# EAGLE board astable_sch (1) (EAGLE 8.7.0)
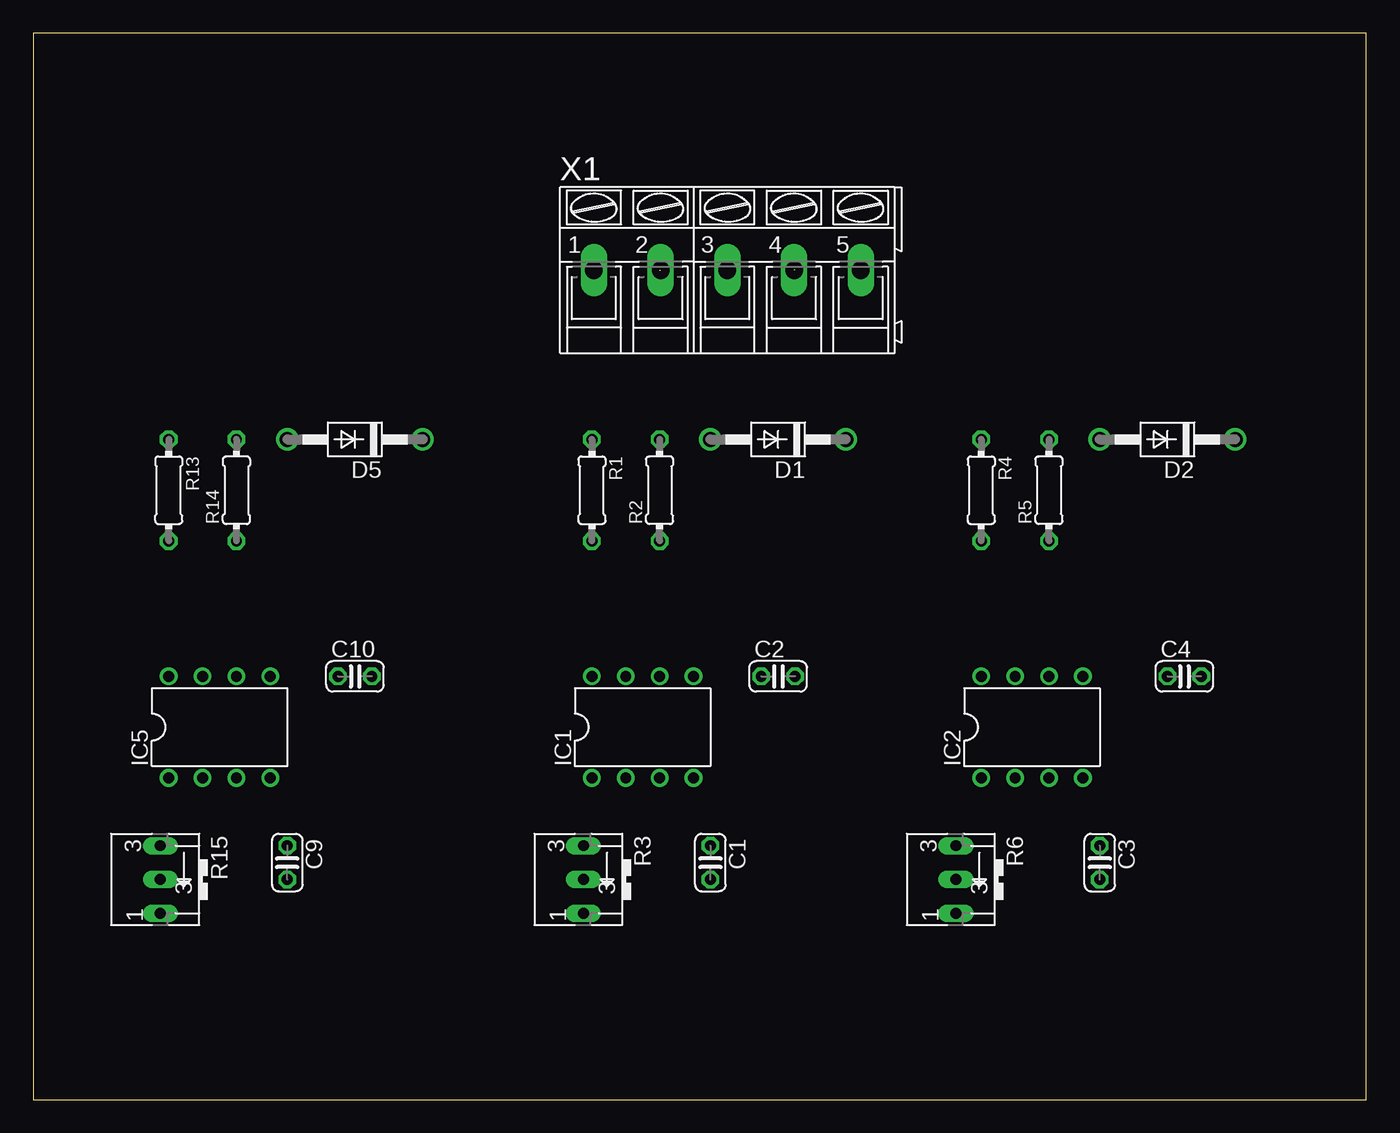
[diagram p0: board, top side]
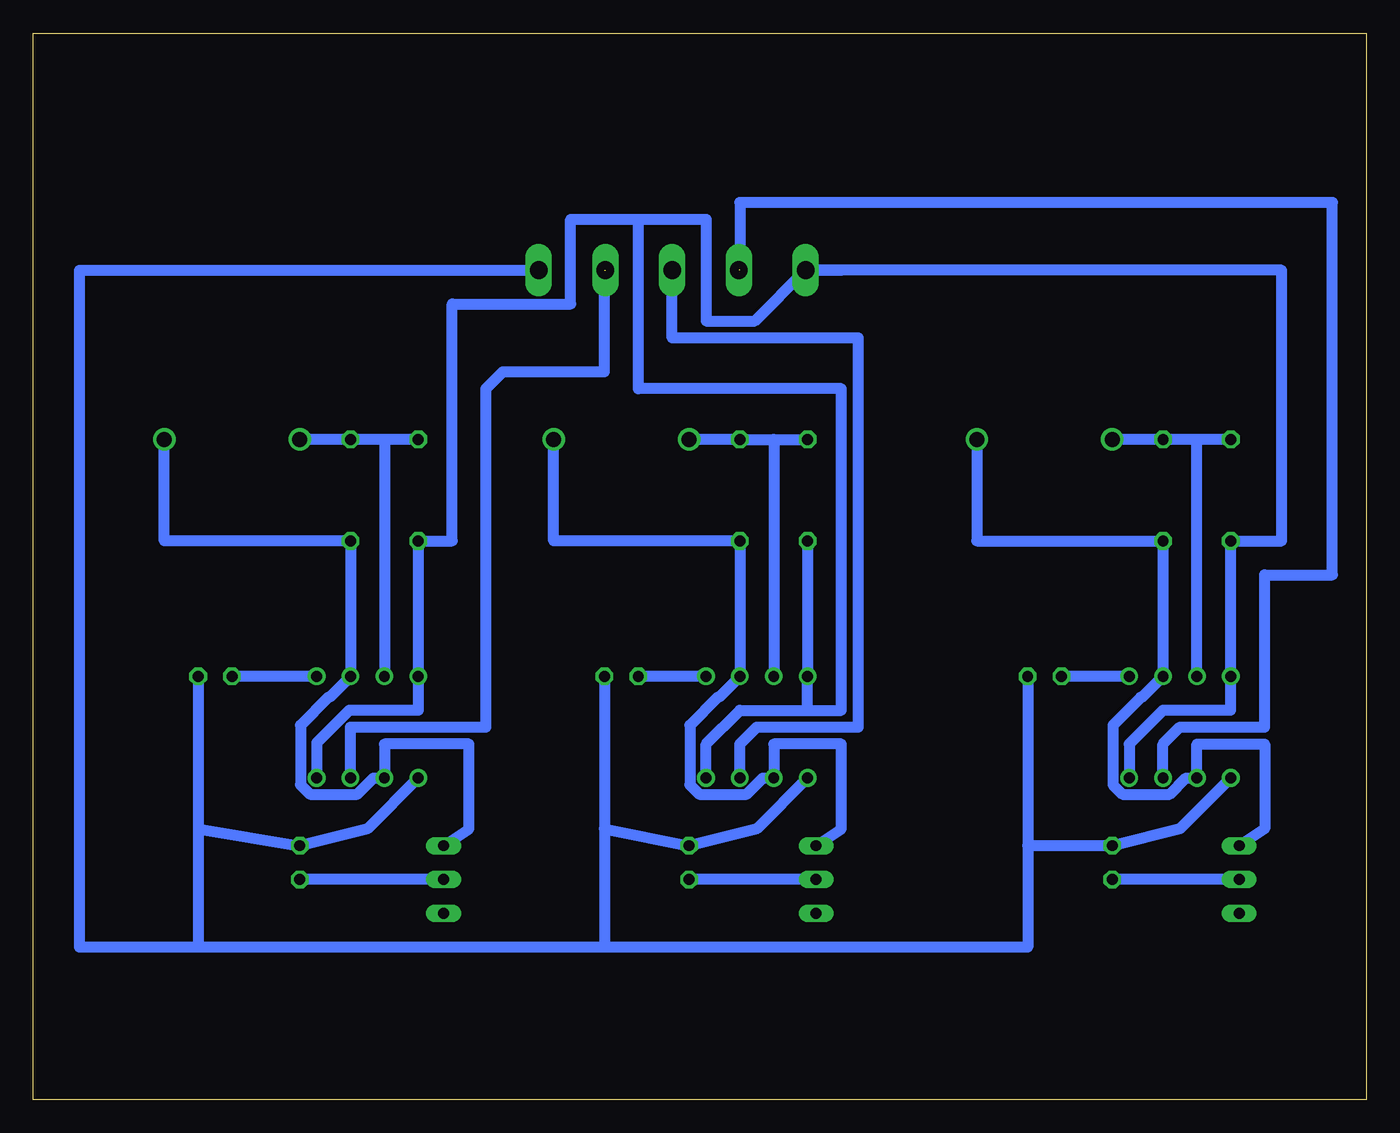
[diagram p1: board, bottom side, seen from below]

Size 100 x 80 mm. Coordinates in mm from the lower left corner, seen from the top.
Outline: 0,0 100,0 100,80 0,80 0,0
Copper layers (1*16): Top 0.035mm / dielectric 1.5mm / Bottom 0.035mm
Design rules "default": minimum track width 6mil, minimum drill 0.35mm, track to track 6mil, track to pad 6mil, pad to pad 6mil, via to via 6mil, smd to smd 6mil, copper to edge 40mil, drill to drill 6mil, minimum pad ring 10mil, minimum via ring 8mil, stop-mask expansion 4mil, vias tented up to drill 0mil, thermal gap 10mil

## Footprints (pad centres in the part's own frame; a part is rotated, then mirrored left to right if it is on the bottom)
C025-024X044 = drill 0.813 octagon: 1 -1.27,0; 2 1.27,0
DO41-10 = drill 1.118: A 5.08,0; C -5.08,0
DIL08 = drill 0.813 pad 1.27: 1 -3.81,-3.81; 2 -1.27,-3.81; 3 1.27,-3.81; 4 3.81,-3.81; 5 3.81,3.81; 6 1.27,3.81; 7 -1.27,3.81; 8 -3.81,3.81
0204/7 = drill 0.813 octagon: 1 -3.81,0; 2 3.81,0
B25V = drill 0.813 long: A 2.54,0.635; E -2.54,0.635; S 0,0.635
AK300/5 = drill 1.321 long: 1 -10.008,0; 2 -5.004,0; 3 0,0; 4 5.004,0; 5 10.008,0

## Placement (x,y rotation side)
C1  [C025-024X044]  50.8,17.78 270 top
C2  [C025-024X044]  55.88,31.75 0 top
C3  [C025-024X044]  80.01,17.78 270 top
C4  [C025-024X044]  86.36,31.75 0 top
C9  [C025-024X044]  19.05,17.78 270 top
C10  [C025-024X044]  24.13,31.75 0 top
D1  1N4004  [DO41-10]  55.88,49.53 180 top
D2  1N4004  [DO41-10]  85.09,49.53 180 top
D5  1N4004  [DO41-10]  24.13,49.53 180 top
IC1  LM555N  [DIL08]  45.72,27.94 0 top
IC2  LM555N  [DIL08]  74.93,27.94 0 top
IC5  LM555N  [DIL08]  13.97,27.94 0 top
R1  [0204/7]  41.91,45.72 270 top
R2  [0204/7]  46.99,45.72 90 top
R3  [B25V]  40.64,16.51 270 top
R4  [0204/7]  71.12,45.72 270 top
R5  [0204/7]  76.2,45.72 90 top
R6  [B25V]  68.58,16.51 270 top
R13  [0204/7]  10.16,45.72 270 top
R14  [0204/7]  15.24,45.72 90 top
R15  [B25V]  8.89,16.51 270 top
X1  [AK300/5]  52.07,62.23 0 top

## Library data of the parts
C1-C4 C9 C10 = rcl; SPICEPREFIX: C
D1 D2 D5 = diode
IC1 IC2 IC5 = linear
R1 R2 R4 R5 R13 R14 = rcl; SPICEPREFIX: R
R3 R6 R15 = pot
X1 = con-ptr500; OC_FARNELL: unknown; OC_NEWARK: unknown

## Nets
GND: C1.1 C2.2 C3.1 C4.2 C9.1 C10.2 IC1.1 IC2.1 IC5.1 X1.5
N$1: D1.A IC1.7 R1.1 R2.2
N$2: D1.C IC1.2 IC1.6 R2.1 R3.E
N$3: C2.1 IC1.5
N$4: IC1.3 X1.3
N$5: C1.2 R3.S
N$6: D2.A IC2.7 R4.1 R5.2
N$7: D2.C IC2.2 IC2.6 R5.1 R6.E
N$8: C4.1 IC2.5
N$9: IC2.3 X1.4
N$10: C3.2 R6.S
N$21: D5.A IC5.7 R13.1 R14.2
N$22: D5.C IC5.2 IC5.6 R14.1 R15.E
N$23: C10.1 IC5.5
N$24: IC5.3 X1.2
N$25: C9.2 R15.S
VCC: IC1.4 IC1.8 IC2.4 IC2.8 IC5.4 IC5.8 R1.2 R4.2 R13.2 X1.1

## Tracks (layer width: path | path; a pad name or v marks a point on that pad's centre or on a via)
GND
  Bottom 0.813: IC1.1 45.72,20.32 C1.1 57.15,20.32 | C2.2 57.15,20.32 | IC2.1 74.93,20.32 C3.1 87.63,20.32 | C4.2 87.63,20.32 | 57.15,11.43 87.63,11.43 | 87.63,11.43 96.52,11.43 96.52,62.23 X1.5 | 57.15,20.32 57.15,11.43 | 87.63,20.32 87.63,11.43 | IC5.1 13.97,20.32 C9.1 25.4,19.05 | C10.2 25.4,19.05 | 25.4,19.05 25.4,11.43 57.15,11.43
N$1
  Bottom 0.813: 44.45,49.53 R2.2 D1.A | 44.45,49.53 R1.1 | 44.45,49.53 IC1.7
N$2
  Bottom 0.813: R3.E 39.37,20.32 39.37,26.67 44.45,26.67 IC1.2 45.27,24.13 46.48,22.91 50.03,22.91 50.75,23.62 50.75,28.09 48.66,30.18 48.56,30.18 IC1.6 R2.1 60.96,41.91 D1.C
N$3
  Bottom 0.813: IC1.5 C2.1
N$4
  Bottom 0.813: IC1.3 46.99,26.67 45.72,27.94 38.1,27.94 38.1,57.15 52.07,57.15 X1.3
N$5
  Bottom 0.813: R3.S C1.2
N$6
  Bottom 0.813: D2.A R5.2 73.66,49.53 | R4.1 73.66,49.53 | 73.66,49.53 IC2.7
N$7
  Bottom 0.813: R6.E 67.31,20.32 67.31,26.67 73.66,26.67 IC2.2 74.48,24.13 75.69,22.91 79.25,22.91 79.96,23.62 79.96,28.09 77.87,30.18 77.78,30.18 IC2.6 R5.1 90.17,41.91 D2.C
N$8
  Bottom 0.813: IC2.5 C4.1
N$9  (1 unrouted)
  Bottom 0.813: IC2.3 76.2,27.94 66.04,27.94 66.04,53.34 64.77,54.61 57.15,54.61 57.15,62.23
N$10
  Bottom 0.813: R6.S C3.2
N$21
  Bottom 0.813: D5.A R14.2 12.7,49.53 | R13.1 12.7,49.53 | IC5.7 12.7,49.53
N$22
  Bottom 0.813: R15.E 7.62,20.32 7.62,26.67 12.7,26.67 IC5.2 13.52,24.13 14.73,22.91 18.29,22.91 19,23.62 19,28.09 16.91,30.18 16.82,30.18 IC5.6 R14.1 29.21,41.91 D5.C
N$23
  Bottom 0.813: IC5.5 C10.1
N$24  (1 unrouted)
  Bottom 0.813: IC5.3 15.24,26.67 13.97,27.94 7.62,27.94 7.62,39.37 2.54,39.37 2.54,67.31 46.99,67.31 46.99,62.23
N$25
  Bottom 0.813: R15.S C9.2
VCC
  Bottom 0.813: 41.91,29.21 IC1.8 R1.2 | IC5.4 17.78,26.67 15.24,29.21 10.16,29.21 IC5.8 R13.2 6.35,41.91 6.35,62.23 X1.1 | X1.1 39.37,62.23 | 41.91,29.21 39.37,29.21 39.37,53.34 54.61,53.34 54.61,66.04 | 54.61,66.04 49.53,66.04 49.53,58.42 45.87,58.42 X1.1 | 54.61,66.04 59.69,66.04 59.69,59.69 68.58,59.69 68.58,41.91 R4.2 IC2.8 71.12,29.21 76.3,29.21 78.74,26.77 IC2.4 | IC1.4 49.53,26.67 46.99,29.21 41.91,29.21